# EAGLE board LMH6881-Breakout (EAGLE 7.7.0)
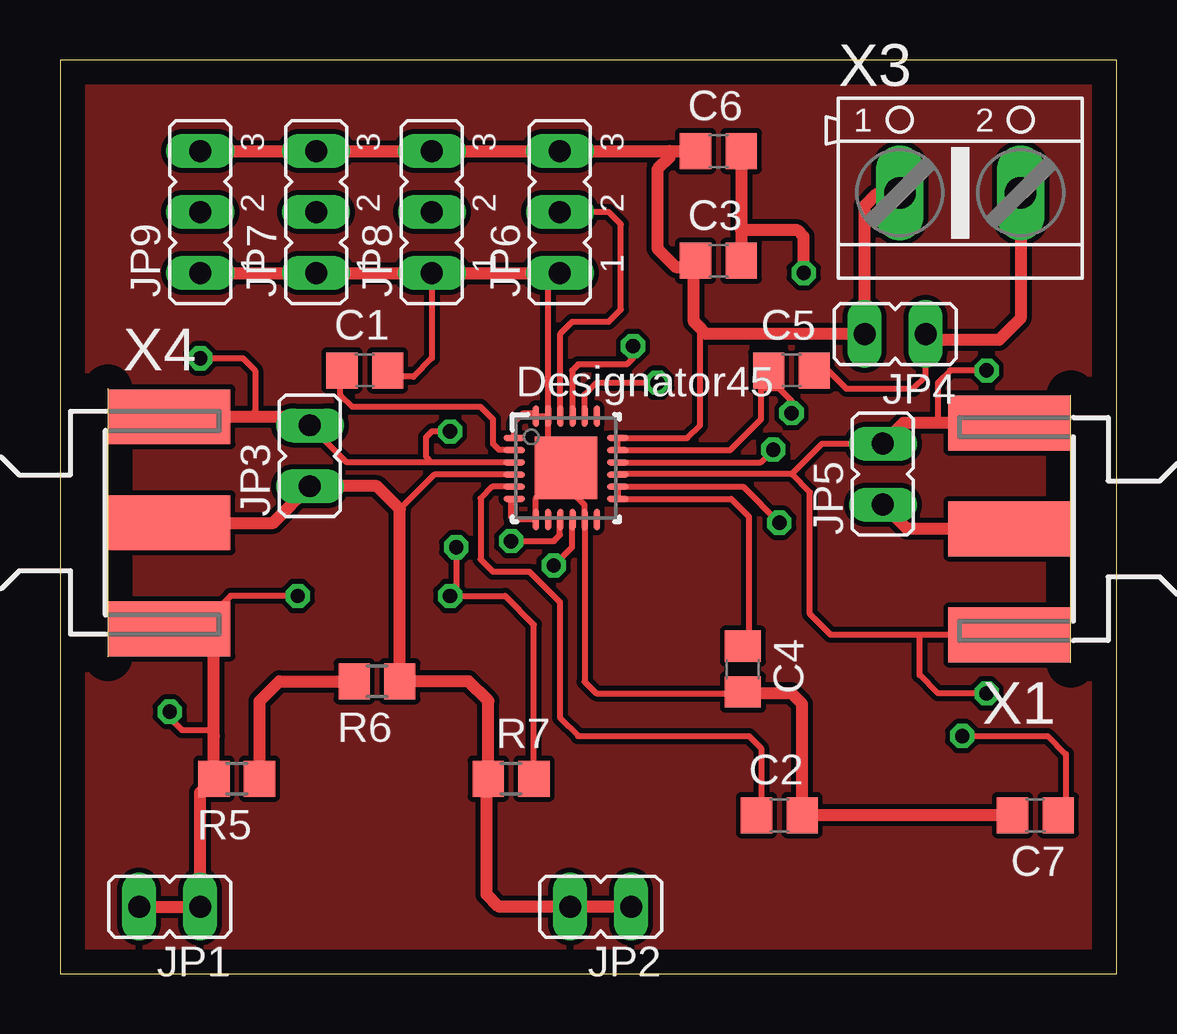
[diagram p0: board, top side]
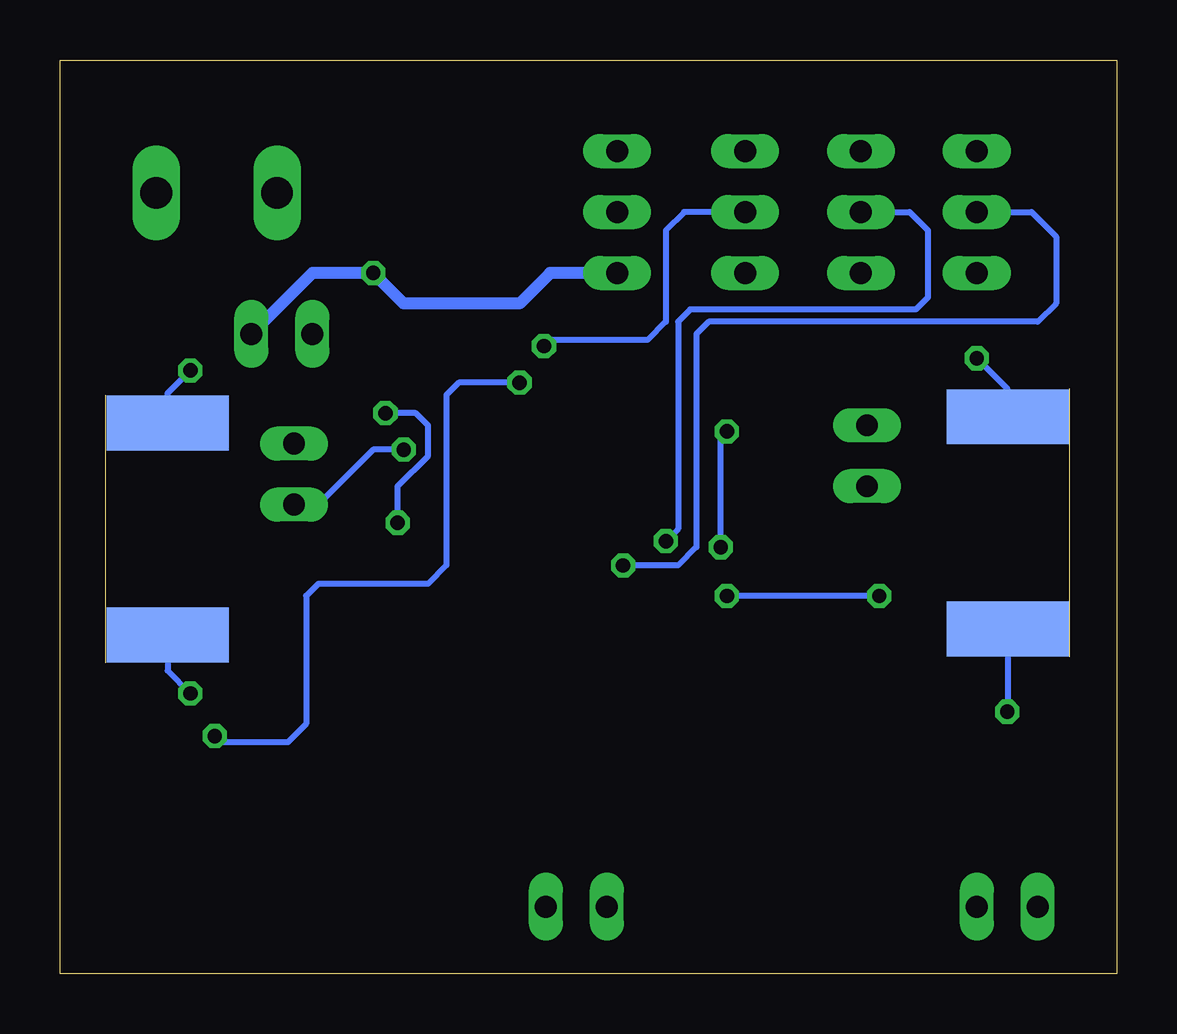
[diagram p1: board, bottom side, seen from below]

Size 44.04 x 38.09 mm. Coordinates in mm from the lower left corner, seen from the top.
Outline: 0,0 44.04,0 44.04,38.09 0,38.09 0,0
Copper layers (1*16): Top 0.035mm / dielectric 1.5mm / Bottom 0.035mm
Design rules "default": minimum track width 10mil, minimum drill 24mil, track to track 8mil, track to pad 8mil, pad to pad 8mil, via to via 8mil, smd to smd 8mil, copper to edge 40mil, drill to drill 8mil, minimum pad ring 10mil, minimum via ring 8mil, stop-mask expansion 4mil, vias tented up to drill 0mil, thermal gap 10mil

## Footprints (pad centres in the part's own frame; a part is rotated, then mirrored left to right if it is on the bottom)
C0805 = smd 1.3 x 1.5: 1 -0.95,0; 2 0.95,0
JP1 = drill 0.914 long: 1 0,-1.27; 2 0,1.27
JP2 = drill 0.914 long: 1 -2.54,0; 2 0,0; 3 2.54,0
R0805 = smd 1.3 x 1.5: 1 -0.95,0; 2 0.95,0
RTW0024A = smd 0.24 x 0.889: 1 1.29,2.164; 2 0.782,2.164; 3 0.274,2.164; 4 -0.234,2.164; 5 -0.742,2.164; 6 -1.25,2.164; 13 -1.25,-2.154; 14 -0.742,-2.154; 15 -0.234,-2.154; 16 0.274,-2.154; 17 0.782,-2.154; 18 1.29,-2.154 | smd 0.889 x 0.24: 7 -2.154,1.25; 8 -2.154,0.742; 9 -2.154,0.234; 10 -2.154,-0.274; 11 -2.154,-0.782; 12 -2.154,-1.29; 19 2.164,-1.29; 20 2.164,-0.782; 21 2.164,-0.274; 22 2.164,0.234; 23 2.164,0.742; 24 2.164,1.25 | smd 2.6 x 2.6: 25 0,0 | smd 0.5 x 0.5: V 0,1
J502-ND-142-0701-801/806 = smd 5.08 x 2.286: 1 2.565,0; G@1 2.565,4.42; G@2 2.565,-4.42 | smd 5.08 x 2.286 bottom: G@3 2.565,4.42; G@4 2.565,-4.42
AK500/2 = drill 1.321 long: 1 -2.515,0; 2 2.515,0

## Placement (x,y rotation side)
C1  1u  [C0805]  12.7,25.15 0 top
C2  1u  [C0805]  29.97,6.6 0 top
C3  1n  [C0805]  27.43,29.72 0 top
C4  1n  [C0805]  28.45,12.7 270 top
C5  1n  [C0805]  30.48,25.15 0 top
C6  1n  [C0805]  27.43,34.29 0 top
C7  0.1u  [C0805]  40.64,6.6 180 top
JP1  [JP1]  4.57,2.79 90 top
JP2  [JP1]  22.53,2.79 90 top
JP3  [JP1]  10.41,21.59 0 top
JP4  [JP1]  34.8,26.67 90 top
JP5  [JP1]  34.29,20.83 0 top
JP6  [JP2]  20.83,31.75 90 top
JP7  [JP2]  10.67,31.75 90 top
JP8  [JP2]  15.49,31.75 90 top
JP9  [JP2]  5.84,31.75 90 top
R5  100  [R0805]  7.37,8.13 180 top
R6  100  [R0805]  13.21,12.19 180 top
R7  100  [R0805]  18.8,8.13 0 top
U1  [RTW0024A]  21.08,21.08 0 top
X1  SMA-142-0701-801/806  [J502-ND-142-0701-801/806]  42.12,18.54 180 top
X3  [AK500/2]  37.51,32.55 0 top
X4  SMA  [J502-ND-142-0701-801/806]  1.99,18.8 0 top

## Library data of the parts
C1-C7 R5-R7 = resistor
JP1-JP9 = jumper
U1 = LMH6881; ALTERNATEPARTNUMBER: LMH6881SQNOPB; APPLICATION_BUILDNUMBER: *; COMPTYPE: IC; MANUFACTURER: Texas Instruments; MOUNTTYPE: SMT; PACKAGEREFERENCE: RTW0024A; PARTNUMBER: LMH6881SQXNOPB; PIN_COUNT: 25; REFDES: RefDes; ROHS: Y; TYPE: TYPE
X1 X4 = con-coax; MF: JOHNSON COMPONENTS; MPN: 142-0701-801; OC_FARNELL: 1608592; OC_NEWARK: 90F2624
X3 = con-ptr500; OC_FARNELL: unknown; OC_NEWARK: unknown

## Nets
+5V: C3.1 C4.1 C5.1 C6.1 JP4.2 JP6.3 JP7.3 JP8.3 JP9.3 U1.19 U1.20 U1.23 U1.24 X3.1
D0: JP6.2 U1.4
D1: JP8.2 U1.3
D2: JP7.2 U1.15
D3: JP9.2 U1.16
GND: C1.2 C2.2 C3.2 C4.2 C5.2 C6.2 C7.2 JP4.1 JP6.1 JP7.1 JP8.1 JP9.1 U1.5 U1.6 U1.7 U1.12 U1.13 U1.17 U1.25 X3.2
INMD: JP1.1 JP1.2 JP3.2 R5.2 R7.2 U1.9 X4.G@1 X4.G@2 X4.G@3 X4.G@4
INPD: JP2.1 JP2.2 JP3.1 R6.1 R7.1 U1.10 X4.1
N$1: C7.1 U1.2
N$3: C1.1 U1.8
N$4: C2.1 U1.11
N$5: JP5.1 U1.22 X1.1
N$6: JP5.2 U1.21 X1.G@1 X1.G@2 X1.G@3 X1.G@4
N$7: R5.1 R6.2

## Tracks (layer width: path | path; a pad name or v marks a point on that pad's centre or on a via)
+5V  (via drill 0.6)
  Top 0.254: 25.91,34.29 C6.1 | 26.16,29.4 C3.1 | C4.1 28.7,13.9 28.7,19.05 27.96,19.79 U1.19 U1.20 28.47,20.3 v29.97,18.8 | 26.54,27.05 26.67,26.92 26.67,22.86 26.14,22.33 U1.24 U1.23 27.92,21.82 29.21,23.11 29.21,24.38 | 29.21,24.38 29.21,24.83 C5.1 | v30.48,23.37 30.48,23.88 29.97,24.38 29.21,24.38
  Top 0.508: JP9.3 JP7.3 JP8.3 JP6.3 25.4,34.29 | 25.4,34.29 25.91,34.29 | 25.4,34.29 25.4,34.04 24.89,33.53 24.89,30.23 25.65,29.46 26.23,29.46 C3.1 26.42,29.65 26.42,27.18 26.54,27.05 26.92,26.67 JP4.2 33.53,32 34.04,32.51 34.96,32.51 X3.1
  Bottom 0.254: v29.97,18.8 29.97,20.32 28.7,21.59 28.7,22.86 29.21,23.37 v30.48,23.37
D0
  Top 0.254: U1.4 20.85,26.69 21.34,27.18 22.86,27.18 23.37,27.69 23.37,31.24 22.86,31.75 JP6.2
D1  (via drill 0.6)
  Top 0.254: U1.3 21.34,23.27 21.34,25.15 21.59,25.4 23.62,25.4 23.88,25.65 v23.88,26.16
  Bottom 0.254: JP8.2 18.03,31.75 18.8,30.99 18.8,27.18 19.56,26.42 23.62,26.42 v23.88,26.16
D2  (via drill 0.6)
  Top 0.254: v18.8,18.03 20.57,18.03 20.83,18.29 20.83,18.91 U1.15
  Bottom 0.254: v18.8,18.03 18.29,18.54 18.29,27.18 17.78,27.69 8.38,27.69 7.87,28.19 7.87,30.99 8.64,31.75 JP7.2
D3  (via drill 0.6)
  Top 0.254: U1.16 21.34,18.91 21.34,17.78 v20.57,17.02
  Bottom 0.254: v20.57,17.02 18.29,17.02 17.53,17.78 17.53,26.67 17.02,27.18 3.3,27.18 2.54,27.94 2.54,30.73 3.56,31.75 JP9.2
GND  (via drill 0.6)
  Top 0.254: U1.5 20.34,28.72 JP6.1 | U1.12 18.8,19.66 18.8,19.05 18.92,18.93 U1.13 19.83,19.83 U1.25 | U1.7 18.93,22.99 19.3,23.37 19.71,23.37 U1.6 U1.5 | C4.2 28.38,11.68 22.35,11.68 21.86,12.17 U1.17 21.84,18.95 21.84,19.56 21.08,20.32 U1.25 | JP8.1 15.49,25.65 14.73,24.89 13.9,24.89 C1.2 | U1.5 20.32,23.23 20.32,21.84 U1.25 | JP4.1 36.07,24.89 35.56,24.38 32.77,24.38 32,25.15 C5.2
  Top 0.508: JP9.1 JP7.1 JP8.1 JP6.1 | X3.2 40.03,27.33 39.12,26.42 36.32,26.42 JP4.1 | C6.2 28.38,30.99 | 28.38,30.99 C3.2 | C7.2 C2.2 30.92,11.24 30.48,11.68 28.51,11.68 C4.2 | v30.99,29.21 30.99,30.73 30.73,30.99 28.38,30.99
  Bottom 0.508: JP6.1 23.62,29.21 24.89,27.94 29.72,27.94 v30.99,29.21 33.53,29.21 JP4.1
INMD  (via drill 0.6)
  Top 0.254: U1.9 15.49,21.32 | 15.49,21.32 11.96,21.32 JP3.2 | R7.2 19.75,14.54 18.54,15.75 v16.26,15.75 16.51,16 v16.51,17.78 | v16.26,22.61 15.49,22.61 15.24,22.35 15.24,21.57 15.49,21.32 | v9.91,15.75 7.11,15.75 5.59,14.22 | v4.57,10.92 4.57,10.67 5.08,10.16 6.16,10.16 6.42,9.91 | v5.84,25.65 7.62,25.65 8.13,25.15 8.13,23.47 7.87,23.22
  Top 0.508: JP1.2 JP1.1 5.84,7.55 R5.2 6.42,9.91 6.42,13.4 5.59,14.22 4.71,14.22 X4.G@2 3.39,14.48 | X4.G@3 7.87,23.22 10.06,23.22 JP3.2
  Bottom 0.254: v9.91,15.75 v16.26,15.75 | v16.51,17.78 16.51,22.35 v16.26,22.61 | 3.29,14.46 X4.G@2 4.56,10.94 v4.57,10.92 | X4.G@3 4.56,24.37 v5.84,25.65
INPD
  Top 0.254: U1.10 15.6,20.81 14.16,19.37
  Top 0.508: JP2.1 JP2.2 18.29,2.79 17.78,3.3 17.78,8.06 R7.1 17.85,11.36 17.02,12.19 R6.1 14.16,19.37 13.21,20.32 JP3.1 | X4.1 8.89,18.8 JP3.1 | 10.67,20.57 JP3.1
N$1  (via drill 0.6)
  Top 0.254: v37.59,9.91 41.15,9.91 41.91,9.14 41.91,6.92 C7.1 | U1.2 21.86,24.15 22.35,24.64 v24.89,24.64
  Bottom 0.254: v24.89,24.64 27.43,24.64 27.94,24.13 27.94,17.02 28.7,16.26 33.27,16.26 33.78,15.75 33.78,10.41 34.54,9.65 37.34,9.65 v37.59,9.91
N$2
  pour Top: 0,0 0,38.1 43.94,38.1 43.94,0
N$3
  Top 0.254: C1.1 11.68,25.08 11.68,24.13 12.19,23.62 17.53,23.62 18.03,23.11 18.03,22.1 18.29,21.84 18.91,21.84 U1.8
N$4
  Top 0.254: U1.11 18.01,20.3 17.53,19.81 17.53,17.27 18.03,16.76 19.56,16.76 20.83,15.49 20.83,10.67 21.59,9.91 28.7,9.91 29.21,9.4 29.21,6.79 C2.1
N$5  (via drill 0.6)
  Top 0.254: U1.22 29.19,21.32 v29.72,21.84
  Top 0.508: X1.1 35.31,18.54 JP5.1
  Bottom 0.254: v29.72,21.84 30.99,21.84 33.27,19.56 JP5.1
N$6  (via drill 0.6)
  Top 0.254: 30.48,20.83 23.27,20.83 U1.21 | 30.48,20.83 31.24,20.07 31.24,14.99 32.11,14.12 35.81,14.12 | 30.48,20.83 31.75,22.1 JP5.2 | X1.G@3 35.81,14.12 | v38.61,25.15 37.08,25.15 36.58,24.64 36.58,22.96 | v38.61,11.68 36.58,11.68 35.81,12.45 35.81,14.12
  Top 0.508: X1.G@2 36.58,22.96 35.15,22.96 JP5.2
  Bottom 0.254: 40.58,14.54 X1.G@3 39.56,12.63 v38.61,11.68 | 40.58,23.94 X1.G@2 39.56,24.2 v38.61,25.15
N$7
  Top 0.508: R5.1 8.32,11.36 9.14,12.19 R6.2